# Altium PCB TIDA-010954-RevB.PcbDoc (part 6 of 8)
Units mm, origin at the board's own origin, x right, y up, seen from the top; angles counter-clockwise.
Board outline 290 x 100 mm, 6 copper layers (Top Layer, Mid1, Mid2, Mid3, Mid4, Bottom Layer), stack 1.59 mm thick; 394 components, 204 nets, 1137 pads, 2188 vias.
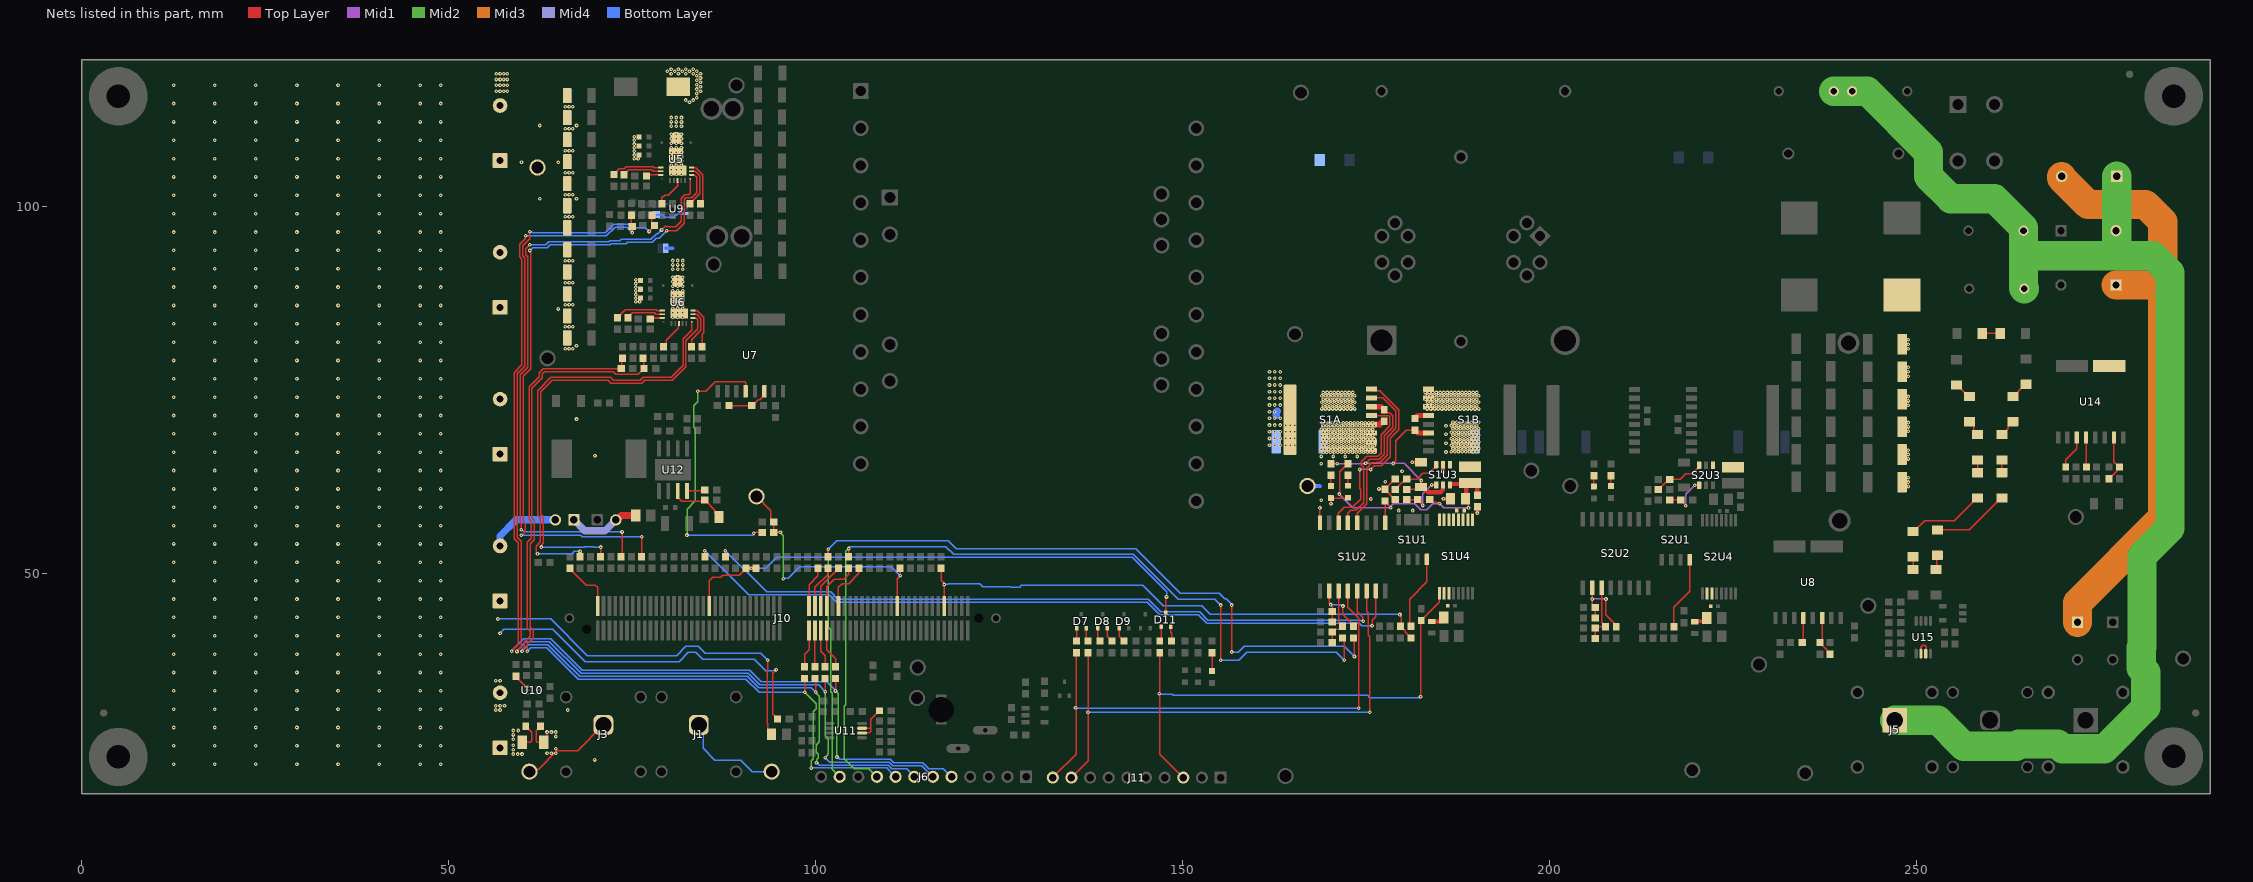
[diagram p8: the nets of this part, all layers, seen from the top]

## Via types
v1: diameter 0.5, hole 0.2, Top Layer to Bottom Layer, tented both sides, 1333 vias
v2: diameter 0.5/0.5/0.5/0.5/0.5/0.5 (per signal layer), hole 0.2, Top Layer to Bottom Layer, tented both sides, 847 vias
v3: diameter 0.63, hole 0.33, Top Layer to Bottom Layer, tented both sides, 6 vias
v4: diameter 0.5, hole 0.2, Top Layer to Bottom Layer, 1 vias
v5: diameter 0.5/0.5/0.5/0.5/0.5/0.5 (per signal layer), hole 0.2, Top Layer to Bottom Layer, 1 vias

## Nets (pads, with @x,y where several pads share a name; then routed paths per layer and width w, separated by ;. In a path a pad name is that pad's centre, name@x,y a point inside that pad or via, vN(x,y) a via of type N, cw(c..) or ccw(c..) an arc to the next point about the centre after c; other vN are vias at no path point) (continued)
NetD7_1: D7.1 R67.2 | length 1.8
  Top Layer w0.2: D7.1@135.55,42.55 135.55,40.85 R67.2@135.6,40.8
NetD7_2: D7.2 R69.2 | length 2
  Top Layer w0.2: D7.2@136.85,42.55 136.85,41.05 R69.2@137.2,40.7
NetD8_1: D8.1 R70.2 | length 2
  Top Layer w0.2: D8.1@138.45,42.55 138.45,41.2 138.85,40.8 R70.2@138.9,40.8
NetD8_2: D8.2 R71.2 | length 2.3
  Top Layer w0.2: D8.2@139.75,42.55 139.75,41.45 140.5,40.7 R71.2@140.6,40.7
NetD9_1: D9.1 R72.2 | length 2.4
  Top Layer w0.2: D9.1@141.35,42.55 141.35,41.475 142.2,40.625 R72.2@142.2,40.5
NetD10_1: D10.1 R82.1 | length 2.5
  Top Layer w0.2: D10.1@154,36.725 R82.1@154,39.2
NetD11_1: D11.1 R83.2 | length 2.2
  Top Layer w0.2: R83.2@146.6,40.8 146.65,40.8 147.05,41.2 D11.1@147.05,42.75
NetD11_2: D11.2 R85.2 | length 1.6
  Top Layer w0.2: D11.2@148.35,42.75 148.35,42.017 148.5,41.867 R85.2@148.5,41.2
NetF2_1: F2.1 R95.2 R99.1 U14.1 | length 81.3
  Mid3 w4: R95.2@269.725,104.075 269.725,103.883 273.331,100.277 281.157,100.277 283.5,97.934 283.5,89.3 283.5,57.6 271.9,46 F2.1@271.9,43.34 ; R99.1@277.15,89.3 282.6,89.3
NetJ7_1: J7.1 J8.2 L6.1 | length 9.9
  Top Layer w1: J8.2@72.77,57.3 72.919,57.3 73.519,57.9 L6.1@75.4,57.9
  Mid4 w1: J7.1@67.07,57.3 68.545,55.825 71.295,55.825 72.67,57.2 J8.2@72.9,57.2
NetJ10_45: J10.45 R73.2 | length 6.8
  Top Layer w0.2: J10.45@103.1,45.6 103.1,48.1 103.6,48.6 104.491,48.6 105.9,50.009 R73.2@105.9,50.7
NetJ10_49: J10.49 R74.2 | length 7.1
  Top Layer w0.2: J10.49@101.5,45.6 101.5,48.192 102.508,49.2 103.8,49.2 104.5,49.9 R74.2@104.5,50.7
NetJ10_50: J10.50 R75.1 | length 5.4
  Top Layer w0.2: J10.50@101.5,42.2 101.5,39.6 102.7,38.4 R75.1@102.7,37.3
NetJ10_51: J10.51 R76.2 | length 6.1
  Top Layer w0.2: J10.51@100.7,45.6 100.7,48.275 103.1,50.675 R76.2@103.1,50.7
NetJ10_52: J10.52 R77.1 | length 5.1
  Top Layer w0.2: J10.52@100.7,42.2 100.7,39.4 101.3,38.8 R77.1@101.3,37.3
NetJ10_53: J10.53 R78.2 | length 5.8
  Top Layer w0.2: J10.53@99.9,45.6 99.9,48.1 101.7,49.9 R78.2@101.7,50.7
NetJ10_54: J10.54 R79.1 | length 4.9
  Top Layer w0.2: R79.1@99.9,37.3 J10.54@99.9,42.2
NetJ10_55: J10.55 R80.2 | length 5.6
  Top Layer w0.2: J10.55@99.1,45.6 99.1,48.487 100.3,49.688 R80.2@100.3,50.7
NetJ10_56: J10.56 R81.1 | length 5.1
  Top Layer w0.2: R81.1@98.5,37.3 98.5,39 99.1,39.6 J10.56@99.1,42.2
NetJ10_119: J10.119 R94.2 | length 7.4
  Top Layer w0.2: R94.2@66.5,50.7 66.5,50.675 68.775,48.4 70,48.4 70.3,48.1 J10.119@70.3,45.6
NetR16_2: R16.2 U5.14 | length 4.3
  Top Layer w0.2: R16.2@79.06,100.382 79.06,101.18 79.437,101.557 79.894,101.557 81.175,102.838 U5.14@81.175,103.532 ; R16.2@79.16,100.382 R16.2@79.175,100.397
NetR18_2: R18.2 U5.10 | length 2
  Top Layer w0.2: R18.2@76.95,104.182 77.075,104.307 U5.10@78.9,104.307
NetR19_1: R19.1 U5.9 | length 5.4
  Top Layer w0.2: R19.1@73.9,104.332 73.9,104.357 74.525,104.982 77.7,104.982 77.875,104.807 U5.9@78.9,104.807
NetR20_1: R20.1 U5.8 | length 6.9
  Top Layer w0.2: R20.1@72.5,104.332 R20.1@72.5,104.344 72.5,104.369 73.263,105.132 73.9,105.132 74.2,105.432 77.886,105.432 78.011,105.307 U5.8@78.9,105.307
NetR22_1: R22.1 U5.3 | length 5.7
  Top Layer w0.2: R22.1@82.9,100.382 82.9,100.407 84.197,101.704 84.197,104.17 83.565,104.802 83.105,104.802 U5.3@83.1,104.807
NetR23_1: R23.1 U5.4 | length 6
  Top Layer w0.2: U5.4@83.1,105.307 83.637,105.307 84.486,104.458 ; R23.1@84.3,100.407 R23.1@84.3,100.382 84.597,100.679 84.597,104.336 84.48,104.453
NetR26_2: R26.2 U6.14 | length 4
  Top Layer w0.2: R26.2@79.36,80.9 79.635,81.175 79.635,81.75 81.3,83.415 81.3,83.683 81.35,83.733 81.35,84.025 U6.14@81.375,84.05
NetR29_2: R29.2 U6.10 | length 1.7
  Top Layer w0.2: R29.2@77.45,84.7 R29.2@77.475,84.725
  Top Layer w0.25: R29.2@77.4,84.8 77.425,84.825 U6.10@79.1,84.825
NetR30_1: R30.1 U6.9 | length 5.1
  Top Layer w0.2: R30.1@74.4,84.85 74.4,84.875 75.025,85.5 78.049,85.5 78.224,85.325 U6.9@79.1,85.325
NetR31_1: R31.1 U6.8 | length 6.6
  Top Layer w0.2: R31.1@73,84.875 73.6,85.475 73.6,85.485 74.065,85.95 78.275,85.95 78.4,85.825 U6.8@79.1,85.825 ; U6.8@79.1,85.95 U6.8@79.131,85.95
NetR33_1: R33.1 U6.3 | length 5.6
  Top Layer w0.2: R33.1@83.1,80.9 83.1,81.876 84.35,83.126 84.35,84.736 83.765,85.32 83.305,85.32 U6.3@83.3,85.325
NetR34_1: R34.1 U6.4 | length 5.9
  Top Layer w0.2: U6.4@83.3,85.825 83.325,85.8 83.851,85.8 84.75,84.901 84.75,82.769 84.562,82.581 84.562,80.962 R34.1@84.5,80.9
NetR36_1: R36.1 U8.6 | length 3.5
  Top Layer w0.2: U8.6@234.565,43.925 234.4,43.76 234.565,43.595 234.565,40.635 R36.1@234.6,40.6
NetR37_1: R37.1 U7.6 | length 39.1
  Top Layer w0.2: v1(83.95,74.825) 85.009,74.825 86.284,76.1 90.315,76.1 90.465,75.95 U7.6@90.465,74.825 ; v1(91.565,55.465) 91.646,55.465 91.781,55.6 R37.1@92.7,55.6
  Mid2 w0.2: v1(82.465,55.235) 82.485,55.255 82.485,58.766 83.6,59.881 83.6,69.698 83.4,69.898 83.4,72.857 83.95,73.407 v1(83.95,74.825)
  Bottom Layer w0.2: v1(82.465,55.235) 91.565,55.235 v1(91.565,55.465)
NetR38_1: R38.1 R97.2 | length 2.3
  Top Layer w0.2: R38.1@258.925,82.7 260.9,82.7 R97.2@261.1,82.5
NetR39_2: R39.2 R40.2 U7.8 | length 5.9
  Top Layer w0.2: R40.2@88.191,72.854 R39.2@91.3,72.854 91.325,72.854 92.005,73.534 92.136,73.665 92.37,73.665 93.005,74.3 U7.8@93.005,74.825
NetR41_2: R41.2 R42.2 U8.8 | length 5.7
  Top Layer w0.2: R42.2@236.8,40.6 236.8,40.575 237.8,39.575 237.8,39.1 R41.2@238.1,38.8 ; R42.2@237,40.6 237.105,40.705 U8.8@237.105,43.925
NetR43_2: R43.2 U9.3 | length 4.3
  Bottom Layer w0.2: R43.2@78.3,98.898 79.1,98.898 79.25,98.748 79.25,98.733 79.455,98.528 80.687,98.528 81.187,99.028 U9.3@82.225,99.028
NetR46_2: R46.2 U10.1 | length 2.3
  Top Layer w0.2: R46.2@59,36.1 59.075,36.1 59.575,35.6 59.575,35.5 60.475,34.6 U10.1@60.66,34.6
NetR54_2: R54.2 U11.6 U11.7 | length 5.8
  Top Layer w0.2: U11.6@106.325,28.275 107.275,28.275 107.5,28.5 107.5,28.922 ; U11.7@106.325,28.925 107.497,28.925 107.5,28.922 ; R54.2@108.7,31.3 108.675,31.3 107.5,30.125 107.5,28.922
NetR60_2: R60.2 U12.4 | length 2.6
  Top Layer w0.2: U12.4@82.4,61.4 82.546,61.254 84.754,61.254 R60.2@84.9,61.4
NetR98_1: R98.1 R100.2 U12.3 | length 7.9
  Top Layer w0.2: U12.3@81.205,61.254 81.205,60.404 81.755,59.854 84.754,59.854 R100.2@84.8,59.9 ; R100.2@84.9,60 R100.2@85,59.9 ; R100.2@85,60 85,59.925 86.281,58.644 86.281,58.235 R98.1@86.816,57.7
NetR101_2: R101.2 U14.6 | length 4
  Top Layer w0.2: U14.6@273.065,68.525 273.065,64.535 R101.2@273.1,64.5
NetR102_2: R102.2 R103.2 U14.9 | length 6.5
  Top Layer w0.2: R103.2@276.2,62.9 276.2,62.925 277.225,63.95 277.225,64.125 R102.2@277.6,64.5 277.6,64.525 276.875,65.25 U14.9@276.875,68.525
NetR105_2: R105.2 R106.1 | length 1.9
  Top Layer w0.2: R106.1@263.1,74.125 263.225,74.125 263.75,74.65 263.75,74.75 R105.2@264.403,75.403
NetR106_2: R106.2 R107.1 | length 2.5
  Top Layer w0.2: R107.1@261.6,68.925 261.725,68.925 262.25,69.45 262.25,69.575 262.45,69.775 262.45,70.15 262.975,70.675 R106.2@263.1,70.675
NetR107_2: R107.2 R108.1 | length 1.7
  Top Layer w0.2: R108.1@261.6,63.725 R107.2@261.6,65.475
NetR108_2: R108.2 R109.1 | length 10.6
  Top Layer w0.2: R109.1@252.8,55.925 257.125,55.925 261.475,60.275 R108.2@261.6,60.275
NetR109_2: R109.2 R110.1 | length 2
  Top Layer w0.2: R110.1@252.6,50.525 252.7,50.625 252.7,52.375 R109.2@252.8,52.475
NetR112_2: R112.2 R113.1 | length 1.9
  Top Layer w0.2: R112.2@256,75.2 257.075,74.125 R113.1@257.2,74.125 R113.1@257.2,74.375
NetR113_2: R113.2 R114.1 | length 2.2
  Top Layer w0.2: R113.2@257.2,70.675 257.225,70.675 257.75,70.15 257.75,69.45 258.275,68.925 R114.1@258.3,68.925
NetR114_2: R114.2 R115.1 | length 1.7
  Top Layer w0.2: R115.1@258.3,63.725 R114.2@258.3,65.475
NetR115_2: R115.2 R116.1 | length 10.7
  Top Layer w0.2: R116.1@249.5,55.725 249.625,55.725 251.1,57.2 255.1,57.2 258.175,60.275 R115.2@258.3,60.275
NetR116_2: R116.2 R117.1 | length 2.3
  Top Layer w0.2: R117.1@249.5,50.525 249.125,50.525 249.5,50.9 R116.2@249.5,52.275
NetS1C6_1: S1C6.1 S1R4.1 S1R5.2 S1U2.11 | length 9
  Top Layer w0.2: S1R5.2@170.375,40.601 170.375,40.618 170.549,40.792 170.375,40.967 S1C6.1@170.375,42.027 170.75,42.402 171.418,42.402 171.793,42.777 S1R4.1@171.793,42.801 171.793,42.826 171.24,43.379 S1U2.11@171.24,48.218 ; S1R4.1@171.793,42.992 S1R4.1@171.793,43.017
NetS1C8_1: S1C8.1 S1R6.1 S1R7.2 S1U2.10 | length 10.4
  Top Layer w0.2: S1U2.10@169.97,48.218 169.97,47.518 169.97,45.969 v1(170.173,45.766) 170.375,45.564 S1C8.1@170.375,44.79 S1R7.2@170.375,43.394 170.39,43.379 S1R7.2@170.84,43.379 ; v1(171.836,45.564) 171.836,44.419 173.237,43.017 S1R6.1@173.237,42.992
  Bottom Layer w0.2: v1(170.173,45.766) 171.552,45.766 171.755,45.564 v1(171.836,45.564)
NetS1C13_2: S1C13.2 S1C14.1 S1L2.1 S1U4.2 S1U4.3 | length 2
  Top Layer w0.5: S1L2.1@183.911,43.467 185.191,43.467 185.576,43.852 S1C14.1@185.576,43.994
NetS1D2_1: S1D2.1 S1R10.1 | length 1.3
  Top Layer w0.2: S1D2.1@172.51,62.059 S1R10.1@172.51,63.369
NetS1D3_2: S1D3.2 S1R8.1 | length 1.5
  Top Layer w0.2: S1D3.2@170.193,61.919 S1R8.1@170.193,63.369
NetS1L1_1: S1L1.1 S1U3.1
NetS1R1_1: S1R1.1 S1U1.4 | length 10.1
  Top Layer w0.2: S1R1.1@181.1,42.9 180.9,43.1 180.9,46.5 183.264,48.864 S1U1.4@183.264,51.918
NetS1R9_1: S1R9.1 S1R13.2 S1U3.4 | length 6.4
  Top Layer w0.2: S1R13.2@180.536,60.069 181.936,60.069 181.961,60.069 182.722,59.308 v1(182.722,59.272) ; v1(183.911,62.059) S1U3.4@184.517,62.059
  Mid1 w0.2: v1(182.722,59.272) 182.722,60.87 v1(183.911,62.059)
NetS1R12_1: S1R12.1 S1R14.2 S1U3.3 | length 7.1
  Top Layer w0.2: S1R12.1@178.936,61.469 178.961,61.469 179.986,62.494 180.161,62.494 S1R14.2@180.536,62.869 181.931,62.869 182.701,63.639 183.547,63.639 184.517,64.609 S1U3.3@184.517,64.809
NetS2C6_1: S2C6.1 S2R4.1 S2R5.2 S2U2.11 | length 8.7
  Top Layer w0.2: S2R5.2@206.203,41.156 206.203,41.172 206.377,41.347 206.203,41.521 S2C6.1@206.203,42.581 206.377,42.756 S2R4.1@207.62,42.756 207.62,42.781 207.068,43.334 S2U2.11@207.068,48.172 ; S2R4.1@207.62,42.947 S2R4.1@207.62,42.972
NetS2C8_1: S2C8.1 S2R6.1 S2R7.2 S2U2.10 | length 10.4
  Top Layer w0.2: S2U2.10@205.798,48.172 v1(205.798,46.523) 205.798,45.75 205.803,45.745 205.803,45.72 206.178,45.345 S2C8.1@206.203,45.345 S2R7.2@206.203,43.948 ; v1(207.664,46.523) 207.664,44.373 209.065,42.972 S2R6.1@209.065,42.947
  Mid1 w0.2: v1(205.798,46.523) v1(207.664,46.523)
NetS2C13_2: S2C13.2 S2C14.1 S2L2.1 S2U4.2 S2U4.3 | length 1.3
  Top Layer w0.5: S2L2.1@219.739,43.422 219.817,43.5 S2C14.1@221,43.5
NetS2D2_1: S2D2.1 S2R10.1 | length 1.3
  Top Layer w0.2: S2D2.1@208.338,62.013 S2R10.1@208.338,63.323
NetS2D3_2: S2D3.2 S2R8.1 | length 1.5
  Top Layer w0.2: S2D3.2@206.021,61.873 S2R8.1@206.021,63.323
NetS2L1_1: S2L1.1 S2U3.1
NetS2R1_1: S2R1.1 S2U1.4 | length 10
  Top Layer w0.2: S2R1.1@216.9,42.8 216.9,45.4 219.091,47.591 S2U1.4@219.091,51.872 ; S2R1.1@216.931,42.756 S2R1.1@216.931,42.8
NetS2R9_1: S2R9.1 S2R13.2 S2U3.4 | length 6.4
  Top Layer w0.2: S2R13.2@216.364,60.023 217.764,60.023 217.789,60.023 218.549,59.262 v1(218.549,59.226) ; v1(219.739,62.013) S2U3.4@220.345,62.013
  Mid1 w0.2: v1(218.549,59.226) 218.549,60.824 v1(219.739,62.013)
NetS2R12_1: S2R12.1 S2R14.2 S2U3.3 | length 7.1
  Top Layer w0.2: S2R12.1@214.764,61.423 214.789,61.423 215.814,62.448 215.989,62.448 S2R14.2@216.364,62.823 217.759,62.823 218.528,63.593 219.375,63.593 220.345,64.563 S2U3.3@220.345,64.763
NetU15_6: U15.6 U15.7 | length 2.5
  Top Layer w0.2: U15.6@250.575,39.075 250.575,39.975 250.8,40.2 251.063,40.2 251.273,39.99 251.273,39.348 U15.7@251.225,39.3
PE: C128.2 C129.1 C130.1 C131.2 J5.1 R95.1 R96.2 | length 175
  Mid2 w4: C130.1@238.7,115.7 C131.2@241.2,115.7 243.278,115.7 251.6,107.378 251.6,104.1 254.65,101.05 260.6,101.05 264.55,97.1 C128.2@264.55,96.7 264.55,93.3 ; J5.1@247,30 252.873,30 256.423,26.45 263.577,26.45 263.892,26.765 269.214,26.765 269.854,26.125 275.557,26.125 281.205,31.773 281.205,36.521 280.595,37.131 280.595,39.869 280.695,39.969 280.695,52.369 284.5,56.174 284.5,90.957 282.157,93.3 277.25,93.3 ; C129.1@264.65,88.8 264.55,88.9 264.55,93.3 ; R95.1@277.25,104.1 277.25,96.7 277.25,93.3 ; 264.55,93.3 277.25,93.3
PGND: C25.1 C26.1 C33.1 C34.1 C35.1 C36.1 C37.1 C40.1 C41.1 C42.1 C43.1 C44.1 C70.1 C71.1 C72.1 C74.1 C76.1 C77.1 C78.1 C79.1 C81.1 C82.1 C83.1 C84.1 C85.1 C88.1 C96.1 C99.1 C101.1 C127.1 C140.1 NT1.2 R44.2 R45.1 R48.1 TP26.1 U5.6 U5.17 U5.18 U6.6 U6.17 U6.18 | length 53
  Top Layer w0.2: R44.2@60.05,27 61.083,27 61.3,27.217 61.3,28.375 60.5,29.175 R45.1@60.5,29.2 ; v1(94.6,36.866) 94.172,36.438 94.172,30.828 94.4,30.6 94.4,30.575 94.775,30.2 R48.1@94.8,30.2
  Bottom Layer w0.2: v1(57,41.878) 57.522,42.4 64.178,42.4 68.578,38 81.4,38 82.653,39.253 83.647,39.253 84.6,38.3 91.615,38.3 93.2,36.716 94.6,36.716 v1(94.6,36.866)
  Bottom Layer w0.5: NT1.2@79.581,94.3 80.495,94.3
  other v1: 69.923,66.036 67.423,71.036 67.423,81.036 64.923,86.036 62.423,101.036 67.423,101.036 59.923,106.036 64.923,106.036 62.423,111.036 67.423,111.036
  other v2: 12.532,24.019 18.132,24.019 23.732,24.019 29.332,24.019 34.932,24.019 40.532,24.019 46.132,24.019 48.932,24.019 58.8,25.4 59.4,25.4 60,25.4 58.8,26 12.532,26.519 18.132,26.519 23.732,26.519 29.332,26.519 34.932,26.519 40.532,26.519 46.132,26.519 48.932,26.519 58.8,26.6 58.8,27.4 58.8,28 58.8,28.6 59.5,28.6 12.532,29.019 18.132,29.019 23.732,29.019 29.332,29.019 34.932,29.019 40.532,29.019 46.132,29.019 48.932,29.019 12.532,31.519 18.132,31.519 23.732,31.519 29.332,31.519 34.932,31.519 40.532,31.519 46.132,31.519 48.932,31.519 12.532,34.019 18.132,34.019 23.732,34.019 29.332,34.019 34.932,34.019 40.532,34.019 46.132,34.019 48.932,34.019 12.532,36.519 18.132,36.519 23.732,36.519 29.332,36.519 34.932,36.519 40.532,36.519 46.132,36.519 48.932,36.519 12.532,39.019 18.132,39.019 23.732,39.019 29.332,39.019 34.932,39.019 40.532,39.019 46.132,39.019 48.932,39.019 12.532,41.519 18.132,41.519 23.732,41.519 29.332,41.519 34.932,41.519 40.532,41.519 46.132,41.519 48.932,41.519 12.532,44.019 18.132,44.019 23.732,44.019 29.332,44.019 34.932,44.019 40.532,44.019 46.132,44.019 48.932,44.019 12.532,46.519 18.132,46.519 23.732,46.519 29.332,46.519 34.932,46.519 40.532,46.519 46.132,46.519 48.932,46.519 12.532,49.019 18.132,49.019 23.732,49.019 29.332,49.019 34.932,49.019 40.532,49.019 46.132,49.019 48.932,49.019 12.532,51.519 18.132,51.519 23.732,51.519 29.332,51.519 34.932,51.519 40.532,51.519 46.132,51.519 48.932,51.519 12.532,54.019 18.132,54.019 23.732,54.019 29.332,54.019 34.932,54.019 40.532,54.019 46.132,54.019 48.932,54.019 12.532,56.519 18.132,56.519 23.732,56.519 29.332,56.519 34.932,56.519 40.532,56.519 46.132,56.519 48.932,56.519 12.532,59.019 18.132,59.019 23.732,59.019 29.332,59.019 34.932,59.019 40.532,59.019 46.132,59.019 48.932,59.019 12.532,61.519 18.132,61.519 23.732,61.519 29.332,61.519 34.932,61.519 40.532,61.519 46.132,61.519 48.932,61.519 12.532,64.019 18.132,64.019 23.732,64.019 29.332,64.019 34.932,64.019 40.532,64.019 46.132,64.019 48.932,64.019 12.532,66.519 18.132,66.519 23.732,66.519 29.332,66.519 34.932,66.519 40.532,66.519 46.132,66.519 48.932,66.519 12.532,69.019 18.132,69.019 23.732,69.019 29.332,69.019 34.932,69.019 40.532,69.019 46.132,69.019 48.932,69.019 12.532,71.519 18.132,71.519 23.732,71.519 29.332,71.519 34.932,71.519 40.532,71.519 46.132,71.519 48.932,71.519 12.532,74.019 18.132,74.019 23.732,74.019 29.332,74.019 34.932,74.019 40.532,74.019 46.132,74.019 48.932,74.019 12.532,76.519 18.132,76.519 23.732,76.519 29.332,76.519 34.932,76.519 40.532,76.519 46.132,76.519 48.932,76.519 12.532,79.019 18.132,79.019 23.732,79.019 29.332,79.019 34.932,79.019 40.532,79.019 46.132,79.019 48.932,79.019 65.9,80.6 66.4,80.6 66.9,80.6 12.532,81.519 18.132,81.519 23.732,81.519 29.332,81.519 34.932,81.519 40.532,81.519 46.132,81.519 48.932,81.519 65.9,83.6 66.4,83.6 66.9,83.6 12.532,84.019 18.132,84.019 23.732,84.019 29.332,84.019 34.932,84.019 40.532,84.019 46.132,84.019 48.932,84.019 80.51,84.935 81.21,84.935 81.91,84.935 80.51,85.535 81.21,85.535 81.91,85.535 80.51,86.135 81.21,86.135 81.91,86.135 12.532,86.519 18.132,86.519 23.732,86.519 29.332,86.519 34.932,86.519 40.532,86.519 46.132,86.519 48.932,86.519 65.9,86.6 66.4,86.6 66.9,86.6 80.51,86.735 81.21,86.735 81.91,86.735 75.5,87 76,87 80.51,87.335 81.21,87.335 81.91,87.335 75.5,87.5 80.51,87.935 81.21,87.935 81.91,87.935 75.5,88 75.5,88.5 80.51,88.535 81.21,88.535 81.91,88.535 75.5,89 12.532,89.019 18.132,89.019 23.732,89.019 29.332,89.019 34.932,89.019 40.532,89.019 46.132,89.019 48.932,89.019 80.51,89.135 81.21,89.135 81.91,89.135 75.5,89.5 65.9,89.6 66.4,89.6 66.9,89.6 80.51,89.735 81.21,89.735 81.91,89.735 75.5,90 80.51,90.335 81.21,90.335 81.91,90.335 80.51,91.435 81.21,91.435 81.91,91.435 12.532,91.519 18.132,91.519 23.732,91.519 29.332,91.519 34.932,91.519 40.532,91.519 46.132,91.519 48.932,91.519 80.51,92.035 81.21,92.035 81.91,92.035 65.9,92.6 66.4,92.6 66.9,92.6 80.51,92.635 81.21,92.635 81.91,92.635 12.532,94.019 18.132,94.019 23.732,94.019 29.332,94.019 34.932,94.019 40.532,94.019 46.132,94.019 48.932,94.019 12.532,96.519 18.132,96.519 23.732,96.519 29.332,96.519 34.932,96.519 40.532,96.519 46.132,96.519 48.932,96.519 65.9,98.6 66.4,98.6 66.9,98.6 12.532,99.019 18.132,99.019 23.732,99.019 29.332,99.019 34.932,99.019 40.532,99.019 46.132,99.019 48.932,99.019 12.532,101.519 18.132,101.519 23.732,101.519 29.332,101.519 34.932,101.519 40.532,101.519 46.132,101.519 48.932,101.519 65.9,101.6 66.4,101.6 66.9,101.6 12.532,104.019 18.132,104.019 23.732,104.019 29.332,104.019 34.932,104.019 40.532,104.019 46.132,104.019 48.932,104.019 80.31,104.417 81.01,104.417 81.71,104.417 65.9,104.6 66.4,104.6 66.9,104.6 80.31,105.017 81.01,105.017 81.71,105.017 80.31,105.617 81.01,105.617 81.71,105.617 80.31,106.217 81.01,106.217 81.71,106.217 75.3,106.5 75.8,106.5 12.532,106.519 18.132,106.519 23.732,106.519 29.332,106.519 34.932,106.519 40.532,106.519 46.132,106.519 48.932,106.519 80.31,106.817 81.01,106.817 81.71,106.817 75.3,107 80.31,107.417 81.01,107.417 81.71,107.417 75.3,107.5 65.9,107.6 66.4,107.6 66.9,107.6 75.3,108 80.31,108.017 81.01,108.017 81.71,108.017 75.3,108.5 80.31,108.617 81.01,108.617 81.71,108.617 75.3,109 12.532,109.019 18.132,109.019 23.732,109.019 29.332,109.019 34.932,109.019 40.532,109.019 46.132,109.019 48.932,109.019 80.31,109.217 81.01,109.217 81.71,109.217 75.3,109.5 80.31,109.817 81.01,109.817 81.71,109.817 65.9,110.6 66.4,110.6 66.9,110.6 80.31,110.917 81.01,110.917 81.71,110.917 12.532,111.519 18.132,111.519 23.732,111.519 29.332,111.519 34.932,111.519 40.532,111.519 46.132,111.519 48.932,111.519 80.31,111.517 81.01,111.517 81.71,111.517 80.31,112.117 81.01,112.117 81.71,112.117 65.9,113.6 66.4,113.6 66.9,113.6 12.532,114.019 18.132,114.019 23.732,114.019 29.332,114.019 34.932,114.019 40.532,114.019 46.132,114.019 48.932,114.019 12.532,116.519 18.132,116.519 23.732,116.519 29.332,116.519 34.932,116.519 40.532,116.519 46.132,116.519 48.932,116.519
PRI_CS: C16.1 C38.1 J10.25 R37.2 TP9.1 | length 36.3
  Top Layer w0.2: TP9.1@91.546,60.8 TP9.1@92.246,60.8 ; TP9.1@91.946,60.5 93.9,58.546 93.9,57.375 94.275,57 C16.1@94.3,57 R37.2@94.3,55.6 v1(95.2,55.6) ; J10.25@111.1,45.6 111.1,49.3 v1(111.5,49.7) C38.1@111.5,50.7
  Mid2 w0.2: v1(95.2,55.6) 95.2,55.522 95.55,55.172 95.55,49.35 v1(95.6,49.3)
  Bottom Layer w0.2: v1(95.6,49.3) 95.647,49.347 96.28,49.347 97.832,50.9 110.3,50.9 v1(111.5,49.7)
PVIN: C81.2 C82.2 C83.2 C84.2 C85.2 J1.1 J7.2 L3.1 R51.1 TP2.1 | length 74.4
  Top Layer w0.2: v1(93.449,38.184) 93.449,36.846 93.372,36.769 93.372,29.604 93.449,29.527 93.449,28.635 R51.1@93.984,28.1
  Bottom Layer w0.2: v1(56.7,43.8) 56.728,43.828 63.881,43.828 68.909,38.8 81.069,38.8 82.321,40.053 83.979,40.053 84.931,39.1 92.533,39.1 v1(93.449,38.184) ; J1.1@84.4,29.5 84.655,29.245 84.655,26.174 86.279,24.55 89.802,24.55 91.352,23 TP2.1@94,23
  Bottom Layer w1: C82.2@57,53.75 57,55.1 59.2,57.3 J7.2@64.53,57.3
  other v2: 56.399,31.4 57,31.4 56.399,32 57,32 57.601,32 56.399,35.39 57,35.39 82.8,114.2 82.3,114.5 83.3,114.5 83.8,114.8 83.8,115.4 56.5,115.7 57,115.7 57.5,115.7 58,115.7 84.3,115.7 83.8,116 84.3,116.3 56.5,116.5 57,116.5 57.5,116.5 58,116.5 83.8,116.6 84.3,116.9 83.8,117.2 56.5,117.3 57,117.3 57.5,117.3 58,117.3 84.3,117.5 83.8,117.8 56.5,118.1 57,118.1 57.5,118.1 58,118.1 80.3,118.1 81.3,118.1 82.3,118.1 83.3,118.1 84.3,118.1 79.8,118.4 80.8,118.4 81.8,118.4 82.8,118.4 83.8,118.4 80.3,118.7 81.3,118.7 82.3,118.7 83.3,118.7
PVRTN: J3.1 R44.1 R47.1 TP4.1 | length 17.7
  Top Layer w0.2: TP4.1@61,23 61.343,23.343 62.243,23.343 64.747,25.847 67.567,25.847 J3.1@71.08,29.36 ; R47.1@62.5,29.2 62.5,29.175 61.9,28.575 61.9,27.117 62.017,27 R44.1@62.95,27 63.4,27.45 v2(63.4,28.4)
  other v2: 69.9,24.6 63.4,25.5 64,25.5 64.6,25.5 64.6,26.1 64.6,27.8 64,28.4 64.6,28.4 66.2,31.4
PWR_FLT: C119.1 D11.3 J10.81 R84.1 | length 71.4
  Top Layer w0.2: J10.81@85.5,46.4 85.5,49 86,49.5 87.091,49.5 87.32,49.73 89.555,49.73 C119.1@90.512,50.687 ; R84.1@91.55,50.7 R84.1@91.9,50.7 ; D11.3@147.7,44.8 147.7,44.85 v1@147.7,46.619
  Top Layer w0.5: C119.1@90.5,50.7 R84.1@91.55,50.7
  Bottom Layer w0.2: v1(91.2,50.7) 93.222,50.7 94.722,52.2 143.1,52.2 147.8,47.5 v1(147.8,46.8)
Q1_G: J6.5 R15.1 R17.2 R75.2 | length 151.5
  Top Layer w0.2: v1@58.6,39.3 58.6,39.454 59.5,40.354 59.5,41.1 59.5,54.194 58.95,54.744 58.95,77.374 59.988,78.412 59.988,92.827 59.692,93.123 59.692,94.846 60.435,95.589 60.435,95.943 v1(60.492,96) ; R15.1@74.9,98.807 74.9,97.5 R17.2@75.059,97.341 ; v1(75,96.45) R17.2@75,97.282 ; v1(102.7,34) R75.2@102.7,35.7
  Mid1 w0.2: v1(58.601,39.409) 58.611,39.4 v1@58.75,39.4
  Mid2 w0.2: v1(102.7,34) 103.1,33.6 103.1,29.191 102.9,28.991 v1(102.9,25)
  Bottom Layer w0.2: v1(58.601,39.409) 58.601,39.455 60.248,41.102 63.898,41.102 68.2,36.8 90.994,36.8 92.578,35.216 101.484,35.216 v1(102.7,34) ; v1@60.492,95.993 71.493,95.993 72.667,97.167 74.283,97.167 v1(75,96.45) ; v1(102.9,25) 102.981,25 103.281,24.7 110.191,24.7 110.666,24.225 114.611,24.225 115.411,23.425 117.385,23.425 118.41,22.4 J6.5@118.5,22.4 ; J6.5@118.51,22.6 J6.5@118.6,22.6
Q1_ZVD: R90.1 U5.2 | length 89.5
  Top Layer w0.2: v1(59.9,55.2) 59.937,55.2 60.454,55.717 60.454,56.796 60.15,57.1 60.15,76.877 61.188,77.915 61.188,78.49 61.192,78.494 61.192,93.769 61.042,93.919 v1(61.042,94) ; v1(76.3,55) 76.3,52.7 R90.1@76.4,52.6 ; v1(79.7,96.7) 81.1,96.7 82.125,97.725 82.125,101.006 82.301,101.182 83.109,101.182 83.797,101.87 83.797,104.004 83.52,104.282 83.125,104.282 U5.2@83.1,104.307
  Bottom Layer w0.2: v1(59.9,55.2) 68,55.2 68.2,55 v1(76.3,55) ; v1(61.042,94) 61.435,94.393 63.419,94.393 63.819,94.793 72.001,94.793 72.108,94.9 74.16,94.9 74.36,95.1 77.709,95.1 78.284,95.675 78.675,95.675 v1(79.7,96.7)
Q2_G: J6.6 R21.1 R24.2 R77.2 | length 150.6
  Top Layer w0.2: v1@59.358,39.558 59.9,40.1 59.9,54.359 59.35,54.909 59.35,77.208 60.388,78.247 60.388,92.992 60.092,93.288 60.092,94.68 61.042,95.63 v1(61.042,96.543) ; v1(77.3,96.6) 77.3,96.657 78.025,97.382 R24.2@78.05,97.382 ; R21.1@77.675,98.782 77.675,97.757 77.932,97.5 R24.2@78.05,97.5 ; v1(101.3,33.9) R77.2@101.3,35.9
  Mid2 w0.2: v1(101.3,24.9) 101.3,24.968 101.655,25.323 101.655,25.465 101.732,25.542 101.732,27.468 101.3,27.9 v1(101.3,33.9)
  Bottom Layer w0.2: v1(59.3,39.376) 59.3,39.458 59.45,39.607 59.45,39.628 60.524,40.702 63.733,40.702 68.034,36.4 90.828,36.4 92.413,34.816 100.384,34.816 v1(101.3,33.9) ; v1(61.042,96.543) 61.1,96.486 61.357,96.486 61.45,96.393 71.327,96.393 72.502,97.567 74.448,97.567 74.908,97.108 76.792,97.108 v1(77.3,96.6) ; v1(101.3,24.9) 101.9,24.3 110.025,24.3 110.462,23.862 ; 110.461,23.861 110.496,23.825 114.445,23.825 115.87,22.4 J6.6@115.9,22.4
Q2_ZVD: R91.1 U5.1 | length 85.7
  Top Layer w0.2: v1@59.895,55.905 59.895,56.789 59.75,56.934 59.75,77.043 60.788,78.081 60.788,93.15 60.792,93.154 60.492,93.454 60.492,94.243 v1(61.042,94.793) ; R91.1@73.6,52.2 73.616,52.216 v1(73.616,55.661) ; v1(79,96.8) 79.5,97.3 79.722,97.3 79.772,97.25 80.95,97.25 81.4,97.7 ; 81.392,97.708 81.675,97.99 81.675,101.122 82.135,101.582 82.705,101.582 82.925,101.802 U5.1@82.925,103.757
  Bottom Layer w0.2: v1(59.904,55.945) 59.985,55.945 60.269,55.661 v1(73.616,55.661) ; v1(61.042,94.793) 63.254,94.793 63.654,95.193 71.836,95.193 71.942,95.3 73.298,95.3 73.498,95.5 77.543,95.5 78.314,96.27 78.47,96.27 v1(79,96.8)
Q3_G: J6.7 R27.1 R28.2 R79.2 | length 121.4
  Top Layer w0.2: v1(60,39.4) 60.057,39.457 60.057,39.692 60.3,39.934 60.3,40.658 61.1,41.458 61.1,42.1 60.7,42.5 60.7,54.231 61.263,54.795 61.263,57.118 60.991,57.391 ; 61,57.4 60.95,57.45 60.95,75.413 62.35,76.813 62.35,77.344 62.907,77.9 R28.2@73.5,77.9 ; R28.2@73.6,77.9 73.6,79.05 R27.1@73.85,79.3 ; v1(100,33.8) 100,35.4 R79.2@100.1,35.5
  Mid2 w0.2: v1(100,33.8) 100,33.75 100.5,33.25 100.5,27.067 100.383,26.95 100.372,26.95 100.05,26.628 100.05,25.619 100.33,25.339 100.33,24.85 100.157,24.677 100.157,24.257 v1(100.1,24.2)
  Bottom Layer w0.2: v1(60,39.4) 60,39.478 60.824,40.302 63.498,40.302 66.685,37.115 66.753,37.115 67.869,36 90.663,36 92.247,34.416 99.384,34.416 v1(100,33.8) ; v1(100.1,24.2) 100.181,24.2 100.481,23.9 109.856,23.9 110.331,23.425 112.375,23.425 J6.7@112.9,22.9 ; J6.7@112.865,22.865 113.13,22.6 J6.7@113.4,22.6
Q3_ZVD: R92.1 U6.2 | length 60.2
  Top Layer w0.2: v1(62.6,53.6) 62.655,53.655 62.655,53.923 62.863,54.132 62.863,57.781 62.55,58.094 62.55,74.75 64.1,76.3 66.734,76.3 71.713,76.3 72.087,75.925 76.297,75.925 76.697,76.325 80.456,76.325 82.325,78.194 82.325,81.724 83.95,83.349 83.95,84.545 83.695,84.8 83.325,84.8 U6.2@83.3,84.825 ; R92.1@70.7,52.2 v1(70.7,53.6)
  Bottom Layer w0.2: v1(62.6,53.6) 68.5,53.6 68.55,53.65 69.792,53.65 69.842,53.6 v1(70.7,53.6)
Q4_G: J6.8 R32.1 R35.2 R81.2 | length 120.6
  Top Layer w0.2: v1(60.7,39.4) 60.7,40.4 61.5,41.2 61.5,42.266 61.1,42.666 61.1,54.066 61.663,54.629 61.663,57.284 61.35,57.597 61.35,75.247 62.75,76.647 62.75,77.178 63.072,77.5 72.4,77.5 72.775,77.125 75.8,77.125 76.575,77.9 R35.2@76.6,77.9 R32.1@76.6,79.3 ; R81.2@98.5,35.5 98.531,35.469 v1(98.531,33.8)
  Mid2 w0.2: v1(98.531,33.8) 100.1,32.231 100.1,31.6 99.65,31.15 99.65,24.75 99.4,24.5 v1(99.4,23.5)
  Bottom Layer w0.2: v1(60.7,39.4) 60.7,39.431 61.171,39.902 63.333,39.902 67.634,35.6 90.497,35.6 92.297,33.8 v1(98.531,33.8) ; v1(99.4,23.5) 109.69,23.5 110.6,22.59 J6.8@110.6,22.2
Q4_ZVD: R93.1 U6.1 | length 57.1
  Top Layer w0.2: v1(62.1,52.7) 62.1,52.767 61.9,52.967 61.9,53.734 62.463,54.298 62.463,57.615 62.15,57.928 62.15,74.916 63.934,76.7 66.9,76.7 72.069,76.7 72.444,76.325 76.131,76.325 76.531,76.725 80.291,76.725 81.925,78.359 81.925,81.956 83.125,83.156 U6.1@83.125,84.275 ; R93.1@67.8,52.425 67.9,52.525 v1(67.9,53)
  Bottom Layer w0.2: v1(62.1,52.7) 66.819,52.7 67.119,53 v1(67.9,53)
REF: C87.1 C94.1 C112.1 C136.2 C137.1 J10.24 R54.1 R118.1 R119.2 U10.5 | length 258.9
  Top Layer w0.2: U10.5@62.2,34.1 61.617,34.1 61.5,34.217 61.5,35.382 61.8,35.682 61.8,35.725 62.175,36.1 C87.1@62.2,36.1 62.575,36.475 62.994,36.475 63.119,36.6 v1(63.2,36.6) ; C94.1@108.7,29.9 108.725,29.9 109.75,30.925 109.925,30.925 R54.1@110.3,31.3 v1(111.9,31.3) ; C112.1@111.05,37.625 C112.1@111.05,37.6 111.1,37.65 v1(111.1,38.701) 111.9,39.501 J10.24@111.9,42.2 ; v1(244.4,39.45) 244.4,44.278 244.822,44.7 C136.2@246.2,44.7 ; C137.1@246.2,43.3 C136.2@246.2,44.7 ; R118.1@246.2,46.1 C136.2@246.2,44.7 ; v1(257.3,40.2) 257.3,42.034 269.7,54.434 269.7,62.275 270.3,62.875 R119.2@270.3,62.9
  Mid2 w0.2: v1(111.1,38.701) 111.9,37.901 v1(111.9,31.3)
  Bottom Layer w0.2: v1(63.2,36.6) 64.937,36.6 67.137,34.4 90,34.4 92,32.4 109.122,32.4 109.472,32.05 111.15,32.05 v1(111.9,31.3) ; v1(111.1,38.701) 111.955,39.556 115.226,39.556 117.232,37.55 127.653,37.55 127.853,37.75 133.831,37.75 134.881,36.7 144.4,36.7 144.5,36.8 224.389,36.8 227.339,39.75 230.584,39.75 231.034,39.3 256.4,39.3 v1(257.3,40.2)
REF: 
REF_TMCS: R119.1 U14.5 | length 4.6
  Top Layer w0.2: R119.1@270.3,64.5 270.3,65.5 271.795,66.995 U14.5@271.795,68.525
S1_PWR_FLT: J11.3 R83.1 S1R11.1 S1U4.1 | length 68.8
  Top Layer w0.2: v1(146.8,33.6) 146.857,33.657 146.857,33.782 146.875,33.8 R83.1@146.875,39.2 ; v1@146.875,33.6 146.875,25.405 149.9,22.38 J11.3@149.9,22.3 ; v1(182.4,33.217) 182.4,43.4 S1R11.1@182.6,43.6 ; S1R11.1@182.537,43.662 184.959,46.084 184.959,46.841 S1U4.1@184.9,46.9
  Bottom Layer w0.2: v1(146.8,33.6) 146.85,33.55 148.562,33.55 148.712,33.4 175.2,33.4 175.5,33.1 182.283,33.1 v1(182.4,33.217)
S1_TMP: C109.2 J10.9 S1C1.1 S1R1.2 | length 73.1
  Top Layer w0.2: C109.2@117.1,50.7 117.1,49.1 v1@117.5,48.7 ; J10.9@117.5,45.6 v1(117.5,48.5) ; v1(179.6,44.4) 179.6,44.319 179.8,44.119 S1C1.1@179.8,42.801 ; S1C1.1@179.753,42.801 179.753,42.776 180.328,42.201 180.328,42.026 180.528,41.826 180.528,41.801 181.13,41.2 S1R1.2@181.3,41.2
  Bottom Layer w0.2: v1(117.5,48.5) 117.557,48.557 118.039,48.557 118.056,48.574 122.345,48.574 122.729,48.189 126.56,48.189 126.599,48.15 127.783,48.15 128.016,48.383 144.551,48.383 147.334,45.6 152.622,45.6 153.772,44.45 179.55,44.45 v1(179.6,44.4)
S1A_FLT: J11.10 R67.1 S1U2.12 | length 73.9
  Top Layer w0.2: J11.10@132.4,22.5 132.6,22.5 135.5,25.4 R67.1@135.5,39.2 ; S1U2.12@172.51,48.218 172.51,47.518 172.51,45.39 174.012,43.888 174.012,31.662 v1(174,31.65)
  Bottom Layer w0.2: v1(135.4,31.7) 135.45,31.65 v1(174,31.65)
S1A_G: J6.9 R74.1 S1R4.2 | length 117.4
  Top Layer w0.2: R74.1@104.3,52.5 104.5,52.7 v1(104.5,53.4) ; v1(155.2,38.2) v1(155.2,45.7) ; v1(172,38.2) S1R4.2@172,41.1
  Mid2 w0.2: v1(104.5,53.4) 104.1,53 104.1,32.088 103.9,31.888 103.9,24.776 105.251,23.425 107.225,23.425 J6.9@108.35,22.3
  Bottom Layer w0.2: v1@104.6,53.6 104.65,53.65 117.75,53.65 118.8,52.6 143.266,52.6 149.366,46.5 154.4,46.5 v1(155.2,45.7) ; v1@155.1,38.2 v1(155.2,38.2) 157.631,38.2 158.731,39.3 170.9,39.3 171.902,38.298 171.998,38.298 v1@172,38.3
S1A_ZVD: R86.1 S1U2.13 | length 96.7
  Top Layer w0.2: R86.1@87.7,52.3 v1(87.7,53.1) ; S1U2.13@173.78,48.218 173.78,47.518 173.78,44.8 174.543,44.037 174.543,43.557 v1(174.6,43.5)
  Bottom Layer w0.2: v1(87.7,53.1) 93.3,47.5 102.03,47.5 103.03,46.5 145.303,46.5 147.008,44.795 152.295,44.795 153.441,43.65 174.231,43.65 174.324,43.557 174.543,43.557 v1(174.6,43.5)
S1B_FLT: J11.9 R69.1 S1U2.14 | length 73.5
  Top Layer w0.2: J11.9@134.9,22.5 135.14,22.5 137.125,24.485 R69.1@137.125,39.2 ; S1U2.14@175.05,48.218 175.05,47.518 175.05,44.859 175.25,44.659 175.25,41.6 175.5,41.35 v1(175.5,31.1)
  Bottom Layer w0.2: v1(137.1,31.1) v1(175.5,31.1)
S1B_G: J6.11 R78.1 S1R6.2 | length 118.4
  Top Layer w0.2: R78.1@101.7,52.5 v1(101.7,53.3) ; v1(156.7,39.3) v1(156.7,45.7) ; v1(173.4,38.7) 173.4,41.3 S1R6.2@173.5,41.4
  Mid2 w0.2: v1(101.7,53.3) 101.7,42.7 102.034,42.366 102.034,33.888 102.268,33.654 102.268,23.302 J6.11@103.27,22.3
  Bottom Layer w0.2: v1(101.7,53.3) 102.85,54.45 118.081,54.45 119.131,53.4 143.597,53.4 149.697,47.3 154.966,47.3 155.727,46.539 155.939,46.539 156.7,45.778 v1(156.7,45.7) ; v1(156.7,39.3) 157.6,39.3 158.4,40.1 172,40.1 v1(173.4,38.7) v1@173.4,38.6
S1B_ZVD: R87.1 S1U2.15 | length 101.6
  Top Layer w0.2: R87.1@84.9,52.3 v1(84.9,53.1) ; v1(175.8,42.9) 175.8,43.599 176.32,44.119 176.32,46.618 176.238,46.7 S1U2.15@176.2,46.7 ; S1U2.15@176.165,46.735 176.32,46.89 S1U2.15@176.32,48.218
  Bottom Layer w0.2: v1(84.9,53.1) 90.9,47.1 101.864,47.1 102.864,46.1 145.137,46.1 146.842,44.395 152.13,44.395 153.275,43.25 174.066,43.25 174.416,42.9 v1(175.8,42.9)
S1DA: C54.2 C58.2 C62.2 C64.2 C66.2 C68.2 L8.1 S1A.9 S1D1.2 S1R2.2 | length 0.6
  Bottom Layer w1: 162.748,71.559 162.748,71.986 162.871,72.108
  other v1: 164.042,67.488 164.642,67.488 165.242,67.488 164.042,68.398 164.642,68.398 165.242,68.398 164.042,69.308 164.642,69.308 165.242,69.308 164.042,70.218 164.642,70.218 165.242,70.218
  other v2: 248.85,61.852 248.85,62.452 248.85,63.052 248.85,65.607 248.85,66.207 248.85,66.807 161.817,67.488 162.558,67.488 163.3,67.488 161.817,68.398 162.558,68.398 163.3,68.398 161.817,69.308 162.558,69.308 163.3,69.308 248.85,69.363 248.85,69.963 161.817,70.218 162.558,70.218 163.3,70.218 248.85,70.563 161.817,71.128 162.558,71.128 163.3,71.128 161.817,72.038 162.558,72.038 248.85,72.9 161.817,72.948 162.558,72.948 163.3,72.948 248.85,73.5 161.817,73.858 162.558,73.858 163.3,73.858 248.85,74.1 161.817,74.768 162.558,74.768 163.3,74.768 161.817,75.678 162.558,75.678 163.3,75.678 161.817,76.588 162.558,76.588 163.3,76.588 248.85,76.873 248.85,77.473 161.817,77.498 162.558,77.498 163.3,77.498 248.85,78.074 248.85,80.629 248.85,81.229 248.85,81.829
S1S_5V: S1C5.1 S1C9.2 S1C10.1 S1C11.2 S1L1.2 S1R9.2 S1R10.2 S1U2.1 S1U3.6 S1U4.9 S1U4.10 S1U4.11 | length 38.9
  Top Layer w0.2: v1(171.336,60.819) 171.406,60.889 171.406,63.84 172.51,64.944 S1R10.2@172.51,64.969 ; S1C5.1@177.536,59.869 177.59,59.815 S1C5.1@177.59,59.79 ; S1U2.1@177.59,56.818 S1C5.1@177.59,59.79 ; v1(178.336,58.969) 178.336,59.044 S1C5.1@177.59,59.79 ; S1R9.2@183.536,60.069 183.911,59.694 184.746,59.694 184.955,59.485 v1(185.036,59.485) ; S1C10.1@188.652,60.194 188.652,60.029 188.935,59.745 v1(188.935,58.954)
  Top Layer w0.5: S1L1.2@188.202,62.334 S1L1.2@188.652,61.884
  Top Layer w0.6: S1U3.6@186.417,62.059 186.417,62.196 188.065,62.196 S1L1.2@188.202,62.334 ; S1C10.1@188.652,60.194 188.652,61.884 188.652,61.934 189.052,62.334 S1L1.2@189.115,62.334 189.736,62.334 190.136,61.934 S1C9.2@190.136,60.669
  Mid1 w0.2: v1(171.336,60.819) 173.186,58.969 v1(178.336,58.969) 178.336,59.169 178.652,59.485 181.644,59.485 182.427,58.702 183.269,58.702 184.052,59.485 185.046,59.485 185.046,59.475 185.567,58.954 v1(188.935,58.954)
S1S_10V: S1A.6 S1B.6 S1C3.1 S1C4.1 S1C12.1 S1R8.2 S1R12.2 S1U3.5 | length 41.5
  Top Layer w0.2: S1R8.2@170.193,64.969 v1(171.059,64.969) ; v1(174.908,64.997) 175.46,65.548 176.767,65.548 177.459,66.239 177.459,68.753 178.634,69.928 178.634,71.508 178.223,71.918 177.834,71.918 177.459,72.293 S1C4.1@177.459,72.318 ; S1A.6@175.698,72.718 S1A.6@176.098,72.718 ; v1(178.672,64.977) 178.672,64.981 179.058,65.368 179.058,68.09 180.486,69.518 S1C3.1@181.631,69.518 ; S1R12.2@180.536,61.469 182.189,61.469 S1C12.1@182.478,61.758 182.498,61.778 v1(182.498,62.659)
  Top Layer w0.6: S1C12.1@182.478,61.758 182.728,61.758 183.434,61.052 185.09,61.052 185.467,61.429 S1U3.5@185.467,62.059
  Top Layer w0.7: S1A.6@175.698,72.718 176.518,72.718 177.059,72.718 177.309,72.468 177.334,72.468 177.459,72.343 S1C4.1@177.459,72.318 ; S1C3.1@181.631,69.518 181.631,69.493 181.706,69.418 181.731,69.418 182.031,69.118 S1B.6@183.481,69.118
  Mid1 w0.2: v1(171.059,64.969) 171.073,64.983 v1@174.836,64.983 ; v1@174.836,65.069 v1(174.908,64.997) 180.16,64.997 v1(182.498,62.659)
S1S_SRC: S1A.1 S1A.2 S1A.3 S1A.4 S1B.1 S1B.2 S1B.3 S1B.4 S1C3.2 S1C4.2 S1C5.2 S1C9.1 S1C10.2 S1C11.1 S1C12.2 S1D2.2 S1D3.1 S1R2.1 S1R3.2 S1R13.1 S1R14.1 S1TP1.1 S1U2.8 S1U3.2 S1U4.12 S1U4.13 S1U4.14 S1U4.15 S1U4.16 | length 19.1
  Top Layer w0.2: S1U2.8@168.7,57.518 v1(168.7,58.954) ; v1(170.193,59.485) S1D3.1@170.193,60.269 172.37,60.269 S1D2.2@172.51,60.409 ; v1(176.736,61.519) 177.386,61.519 S1C5.2@177.436,61.569 ; S1R13.1@178.936,60.069 178.911,60.069 177.911,61.069 177.911,61.094 S1C5.2@177.536,61.469 177.536,61.494 177.911,61.869 177.914,61.869 178.914,62.869 S1R14.1@178.936,62.869 ; S1C10.2@186.595,60.169 S1C10.2@186.62,60.194
  Top Layer w0.5: v1(181.256,65.159) S1C12.2@182.478,65.158 ; v1(185.46,63.9) 185.46,64.802 S1U3.2@185.467,64.809 ; v1(185.536,60.169) S1C10.2@186.595,60.169 ; S1C9.1@190.136,59.069 190.164,59.041 190.164,58.248 v1(190.15,58.235)
  Top Layer w0.7: S1C3.2@181.631,71.118 181.631,71.143 182.006,71.518 S1B.4@183.481,71.518
  Top Layer w0.8: S1A.4@175.698,70.318 176.869,70.318 177.169,70.618 177.384,70.618 177.459,70.693 S1C4.2@177.459,70.718
  Bottom Layer w0.5: S1TP1.1@167,61.919 168.681,61.919 168.7,61.9
  other v1: 179.454,58.569 181.359,58.569 168.867,59.996 175.636,60.145 177.59,62.494 179.882,63.906 168.867,64.969 168.872,65.946 170.506,65.946 172.139,65.946 173.772,65.946 169.122,66.516 169.622,66.516 170.122,66.516 170.622,66.516 171.122,66.516 171.622,66.516 172.122,66.516 172.622,66.516 173.122,66.516 173.622,66.516 174.122,66.516 174.622,66.516 175.122,66.516 175.622,66.516 176.122,66.516 185.872,66.546 186.567,66.569 187.067,66.569 187.567,66.569 188.067,66.569 188.567,66.569 189.067,66.569 189.567,66.569 190.067,66.569 168.867,66.956 169.367,66.956 169.867,66.956 170.367,66.956 170.867,66.956 171.367,66.956 171.867,66.956 172.367,66.956 172.867,66.956 173.367,66.956 173.867,66.956 174.367,66.956 174.867,66.956 175.367,66.956 175.867,66.956 186.822,67.016 187.322,67.016 187.822,67.016 188.322,67.016 188.822,67.016 189.322,67.016 189.822,67.016 190.322,67.016 169.122,67.416 169.622,67.416 170.122,67.416 170.622,67.416 171.122,67.416 171.622,67.416 172.122,67.416 172.622,67.416 173.122,67.416 173.622,67.416 174.122,67.416 174.622,67.416 175.122,67.416 175.622,67.416 176.122,67.416 186.567,67.456 187.067,67.456 187.567,67.456 188.067,67.456 188.567,67.456 189.067,67.456 189.567,67.456 190.067,67.456 185.872,67.746 168.867,67.856 169.367,67.856 169.867,67.856 170.367,67.856 170.867,67.856 171.367,67.856 171.867,67.856 172.367,67.856 172.867,67.856 173.367,67.856 173.867,67.856 174.367,67.856 174.867,67.856 175.367,67.856 175.867,67.856 186.822,67.916 187.322,67.916 187.822,67.916 188.322,67.916 188.822,67.916 189.322,67.916 189.822,67.916 190.322,67.916 169.122,68.316 169.622,68.316 170.122,68.316 170.622,68.316 171.122,68.316 171.622,68.316 172.122,68.316 172.622,68.316 173.122,68.316 173.622,68.316 174.122,68.316 174.622,68.316 175.122,68.316 175.622,68.316 176.122,68.316 186.567,68.356 187.067,68.356 187.567,68.356 188.067,68.356 188.567,68.356 189.067,68.356 189.567,68.356 190.067,68.356 168.867,68.756 169.367,68.756 169.867,68.756 170.367,68.756 170.867,68.756 171.367,68.756 171.867,68.756 172.367,68.756 172.867,68.756 173.367,68.756 173.867,68.756 174.367,68.756 174.867,68.756 175.367,68.756 175.867,68.756 186.822,68.816 187.322,68.816 187.822,68.816 188.322,68.816 188.822,68.816 189.322,68.816 189.822,68.816 190.322,68.816 185.872,68.946 169.122,69.216 169.622,69.216 170.122,69.216 170.622,69.216 171.122,69.216 171.622,69.216 172.122,69.216 172.622,69.216 173.122,69.216 173.622,69.216 174.122,69.216 174.622,69.216 175.122,69.216 175.622,69.216 176.122,69.216 186.567,69.256 187.067,69.256 187.567,69.256 188.067,69.256 188.567,69.256 189.067,69.256 189.567,69.256 190.067,69.256 168.867,69.656 169.367,69.656 169.867,69.656 170.367,69.656 170.867,69.656 171.367,69.656 171.867,69.656 172.367,69.656 172.867,69.656 173.367,69.656 173.867,69.656 174.367,69.656 174.867,69.656 175.367,69.656 175.867,69.656 186.822,69.716 187.322,69.716 187.822,69.716 188.322,69.716 188.822,69.716 189.322,69.716 189.822,69.716 190.322,69.716 169.122,70.116 169.622,70.116 170.122,70.116 170.622,70.116 171.122,70.116 171.622,70.116 172.122,70.116 172.622,70.116 173.122,70.116 173.622,70.116 174.122,70.116 174.622,70.116 175.122,70.116 175.622,70.116 176.122,70.116 185.872,70.146 186.567,70.156 187.067,70.156 187.567,70.156 188.067,70.156 188.567,70.156 189.067,70.156 189.567,70.156 190.067,70.156 168.867,70.556 169.367,70.556 169.867,70.556 170.367,70.556 170.867,70.556 171.367,70.556 171.867,70.556 172.367,70.556 172.867,70.556 173.367,70.556 173.867,70.556 174.367,70.556 174.867,70.556 175.367,70.556 175.867,70.556 186.822,70.616 187.322,70.616 187.822,70.616 188.322,70.616 188.822,70.616 189.322,70.616 189.822,70.616 190.322,70.616 168.922,72.416 169.422,72.416 169.922,72.416 170.422,72.416 170.922,72.416 171.422,72.416 171.922,72.416 172.422,72.416 172.922,72.416 173.422,72.416 183.322,72.416 183.822,72.416 184.322,72.416 184.822,72.416 185.322,72.416 185.822,72.416 186.322,72.416 186.822,72.416 187.322,72.416 187.822,72.416 188.322,72.416 188.822,72.416 189.322,72.416 189.822,72.416 190.322,72.416 169.167,72.856 169.667,72.856 170.167,72.856 170.667,72.856 171.167,72.856 171.667,72.856 172.167,72.856 172.667,72.856 173.167,72.856 183.067,72.856 183.567,72.856 184.067,72.856 184.567,72.856 185.067,72.856 185.567,72.856 186.067,72.856 186.567,72.856 187.067,72.856 187.567,72.856 188.067,72.856 188.567,72.856 189.067,72.856 189.567,72.856 190.067,72.856 168.922,73.316 169.422,73.316 169.922,73.316 170.422,73.316 170.922,73.316 171.422,73.316 171.922,73.316 172.422,73.316 172.922,73.316 173.422,73.316 183.322,73.316 183.822,73.316 184.322,73.316 184.822,73.316 185.322,73.316 185.822,73.316 186.322,73.316 186.822,73.316 187.322,73.316 187.822,73.316 188.322,73.316 188.822,73.316 189.322,73.316 189.822,73.316 190.322,73.316 169.167,73.756 169.667,73.756 170.167,73.756 170.667,73.756 171.167,73.756 171.667,73.756 172.167,73.756 172.667,73.756 173.167,73.756 183.067,73.756 183.567,73.756 184.067,73.756 184.567,73.756 185.067,73.756 185.567,73.756 186.067,73.756 186.567,73.756 187.067,73.756 187.567,73.756 188.067,73.756 188.567,73.756 189.067,73.756 189.567,73.756 190.067,73.756 168.922,74.216 169.422,74.216 169.922,74.216 170.422,74.216 170.922,74.216 171.422,74.216 171.922,74.216 172.422,74.216 172.922,74.216 173.422,74.216 183.322,74.216 183.822,74.216 184.322,74.216 184.822,74.216 185.322,74.216 185.822,74.216 186.322,74.216 186.822,74.216 187.322,74.216 187.822,74.216 188.322,74.216 188.822,74.216 189.322,74.216 189.822,74.216 190.322,74.216 169.167,74.656 169.667,74.656 170.167,74.656 170.667,74.656 171.167,74.656 171.667,74.656 172.167,74.656 172.667,74.656 173.167,74.656 183.067,74.656 183.567,74.656 184.067,74.656 184.567,74.656 185.067,74.656 185.567,74.656 186.067,74.656 186.567,74.656 187.067,74.656 187.567,74.656 188.067,74.656 188.567,74.656 189.067,74.656 189.567,74.656 190.067,74.656
S1SA_FLT: S1A.5 S1U2.5 | length 20.9
  Top Layer w0.2: S1U2.5@172.51,56.918 172.51,58.21 172.9,58.6 173.596,58.6 174.658,59.661 174.658,64.47 174.358,64.769 174.358,65.225 175.082,65.948 176.602,65.948 177.059,66.405 177.059,68.919 178.234,70.094 178.234,71.342 178.058,71.518 S1A.5@175.698,71.518
S1SA_IN: S1A.8 S1U2.6 | length 25.7
  Top Layer w0.2: S1U2.6@171.2,57.2 171.2,58.2 172,59 173.113,59 174.258,60.145 174.258,61.429 174.108,61.579 v1(174.108,64.169) ; v1(175.636,64.169) 175.568,64.169 176.075,64.676 177.026,64.676 178.259,65.908 178.259,68.422 179.433,69.597 179.433,72.308 176.824,74.917 175.899,74.917 S1A.8@175.698,75.118
  Mid1 w0.2: v1(174.108,64.169) v1(175.636,64.169)
S1SA_Z: S1A.7 S1U2.4 | length 21.5
  Top Layer w0.2: S1U2.4@173.78,57.518 173.78,58.218 175.058,59.496 175.058,64.368 175.765,65.076 176.376,65.076 176.449,65.148 176.933,65.148 177.859,66.074 177.859,68.588 179.034,69.763 179.034,72.142 177.258,73.918 S1A.7@175.698,73.918